# Altium PCB Hall Effect Sensor Panel PCB.PcbDoc
Units mm, origin at the board's own origin, x right, y up, seen from the top; angles counter-clockwise.
Board outline 358 x 45 mm, 2 copper layers (Top Layer, Bottom Layer); 56 components, 26 nets, 169 pads, 11 vias.
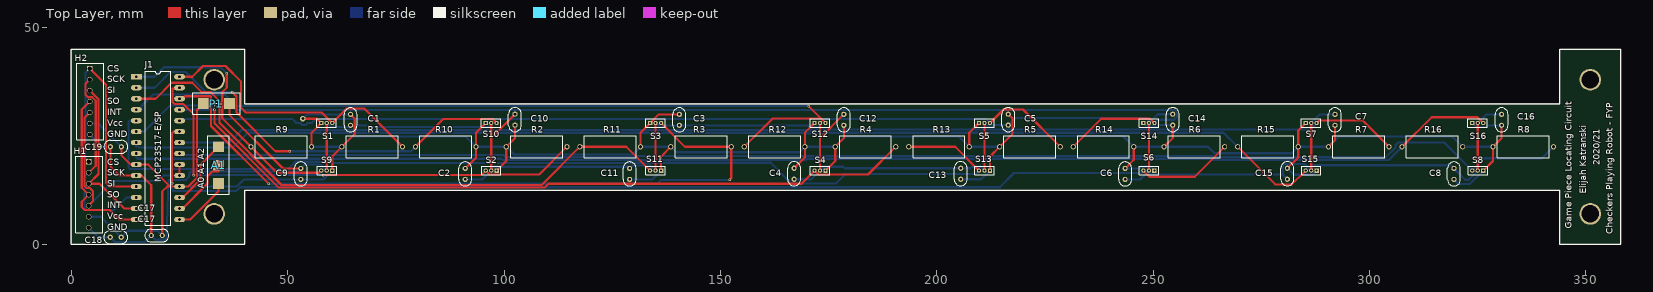
[diagram p0: Top Layer view]
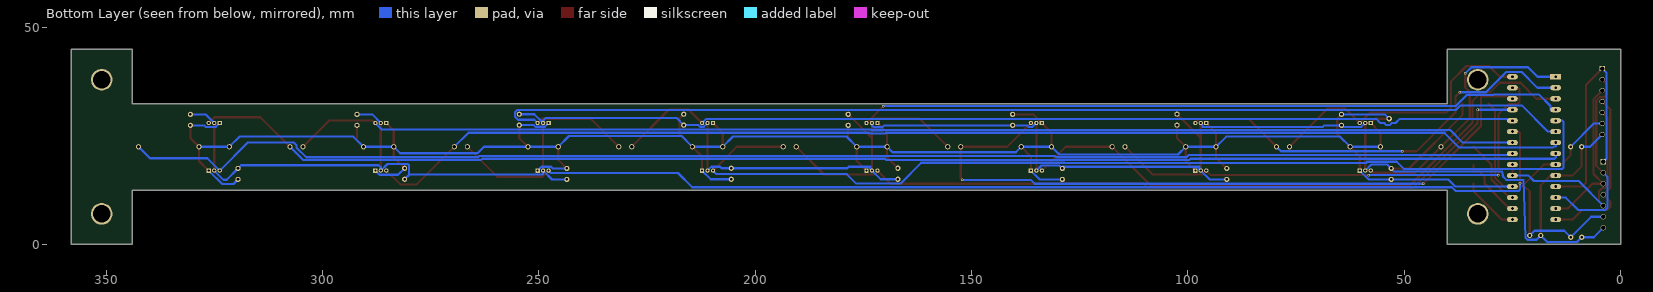
[diagram p1: Bottom Layer view, seen from below]

## Layer stack, top to bottom
Top Solder: solder mask 0.0102, Solder Resist, Dk 3.5
Top Layer: signal copper 0.0356
Dielectric 1: dielectric 0.32, FR-4, Dk 4.8
Bottom Layer: signal copper 0.0356
Bottom Solder: solder mask 0.0102, Solder Resist, Dk 3.5

## Board outline
344,32.5 344,45 358,45 358,0 344,0 344,12.5 40,12.5 40,0 0,0 0,45 40,45 40,32.5

## Design rules (kind name [scope] priority, off if disabled: settings)
Clearance [All] p1: gap=0.13 ignorepadtopadclearanceinfootprint=FALSE
PolygonConnect [All] p1: connectstyle=Relief reliefconductorwidth=0.254 reliefentries=4 polygonreliefangle="90 Angle" airgapwidth=0.254
RoutingVias [All] p1: holewidth=0.3 width=0.6 viastyle="Through Hole" minholewidth=0.3 minwidth=0.6 maxholewidth=0.3 maxwidth=0.6
SolderMaskExpansion [All] p1: expansion=0.102 istentingtop=FALSE
Width [All] p1: maxlimit=1 minlimit=0.3 preferedwidth=0.5
30 further rules are at their usual default settings.

## Components (designator, comment, footprint, x,y, rotation, side; value= is the part's Value field where it differs from the comment)
A1 "Address" ADDRESS 34,17 r90 top
C1 "0.1uF" C320C104K5R5TA 64.5,27.46 r90 top
C2 "0.1uF" C320C104K5R5TA 91,14.96 r90 top
C3 "0.1uF" C320C104K5R5TA 140.5,27.46 r90 top
C4 "0.1uF" C320C104K5R5TA 167,15 r90 top
C5 "0.1uF" C320C104K5R5TA 216.5,27.5 r90 top
C6 "0.1uF" C320C104K5R5TA 243.5,14.96 r90 top
C7 "0.1uF" C320C104K5R5TA 292,30 r270 top
C8 "0.1uF" C320C104K5R5TA 319.5,17.5 r270 top
C9 "0.1uF" C320C104K5R5TA 53,14.96 r90 top
C10 "0.1uF" C320C104K5R5TA 102.5,27.5 r90 top
C11 "0.1uF" C320C104K5R5TA 129,14.96 r90 top
C12 "0.1uF" C320C104K5R5TA 178.5,27.46 r90 top
C13 "0.1uF" C320C104K5R5TA 205.5,15 r90 top
C14 "0.1uF" C320C104K5R5TA 254.5,27.5 r90 top
C15 "0.1uF" C320C104K5R5TA 281,17.54 r270 top
C16 "0.1uF" C320C104K5R5TA 330.5,27.46 r90 top
C17 "0.1uF" C320C104K5R5TA 18.46,2 r0 top
C18 "0.1uF" C320C104K5R5TA 8.96,1.6 r0 top
C19 "0.1uF" C320C104K5R5TA 9,22.5 r0 top
H1 "1x7 Header" MOLEX 4,19.04 r0 top
H2 "1x7 Header" MOLEX 4.24,40.58 r0 top
J1 "16-Bit I/O Expander" MCP23S17-E/SP 15,38.7 r0 top
P1 "Power" POWER 33.5,32.5 r0 top
R1 "4k7R" CFR100J4K7 76.5,22.5 r180 top
R2 "4k7R" CFR100J4K7 114.5,22.5 r180 top
R3 "4k7R" CFR100J4K7 152.5,22.5 r180 top
R4 "4k7R" CFR100J4K7 190.5,22.5 r180 top
R5 "4k7R" CFR100J4K7 228.5,22.5 r180 top
R6 "4k7R" CFR100J4K7 266.5,22.5 r180 top
R7 "4k7R" CFR100J4K7 304.5,22.5 r180 top
R8 "4k7R" CFR100J4K7 342.5,22.5 r180 top
R9 "4k7R" CFR100J4K7 55.5,22.5 r180 top
R10 "4k7R" CFR100J4K7 93.5,22.5 r180 top
R11 "4k7R" CFR100J4K7 131.5,22.5 r180 top
R12 "4k7R" CFR100J4K7 169.5,22.5 r180 top
R13 "4k7R" CFR100J4K7 207.5,22.5 r180 top
R14 "4k7R" CFR100J4K7 245.5,22.5 r180 top
R15 "4k7R" CFR100J4K7 283.5,22.5 r180 top
R16 "4k7R" CFR100J4K7 321.5,22.5 r180 top
S1 "Hall Effect Sensor" A1104EUA-T 57.73,28 r90 top
S2 "Hall Effect Sensor" A1104EUA-T 98.27,17 r270 top
S3 "Hall Effect Sensor" A1104EUA-T 133.73,28 r90 top
S4 "Hall Effect Sensor" A1104EUA-T 174.27,17 r270 top
S5 "Hall Effect Sensor" A1104EUA-T 209.73,28 r90 top
S6 "Hall Effect Sensor" A1104EUA-T 250.27,17 r270 top
S7 "Hall Effect Sensor" A1104EUA-T 285.23,28 r90 top
S8 "Hall Effect Sensor" A1104EUA-T 326.27,17 r270 top
S9 "Hall Effect Sensor" A1104EUA-T 60.27,17 r270 top
S10 "Hall Effect Sensor" A1104EUA-T 95.73,28 r90 top
S11 "Hall Effect Sensor" A1104EUA-T 136.27,17 r270 top
S12 "Hall Effect Sensor" A1104EUA-T 171.73,28 r90 top
S13 "Hall Effect Sensor" A1104EUA-T 212.27,17 r270 top
S14 "Hall Effect Sensor" A1104EUA-T 247.73,28 r90 top
S15 "Hall Effect Sensor" A1104EUA-T 287.77,17 r270 top
S16 "Hall Effect Sensor" A1104EUA-T 323.73,28 r90 top

## Footprints (in the part's own frame and the unit in brackets; to place one, negate y for a bottom-side part, rotate by r counter-clockwise, add the part's x,y. Pads: shape width x height; smd on the part's side, far side on the other; paste and mask are expansions set on the pad)
A1104EUA-T [mm]
  rect 1x1 hole 0.5: 1(0,0)
  round 1 hole 0.5: 2(0,-1.27) 3(0,-2.54)
  silkscreen extent -1,-3.5 1,1
ADDRESS [mm]
  rect 2.5x2.5 smd: 1(-3,0) 2(1.25,0) 3(5.5,0)
  silkscreen extent -5.5,-2.5 8,2.5
C320C104K5R5TA [mm]
  round 1.2 hole 0.6: 1(0,0) 2(2.54,0)
  silkscreen extent -1.5,-1.5 4.04,1.5
CFR100J4K7 [mm]
  round 1.2 hole 0.76: 1(0,0) 2(14,0)
  silkscreen extent 1,-2.5 13,2.5
MCP23S17-E/SP [mm]
  rect 2.5x1.2 hole 0.65: 1(0,0)
  oval 2.5x1.2 hole 0.65: 2(0,-2.54) 3(0,-5.08) 4(0,-7.62) 5(0,-10.16) 6(0,-12.7) 7(0,-15.24) 8(0,-17.78) 9(0,-20.32) 10(0,-22.86) 11(0,-25.4) 12(0,-27.94) 13(0,-30.48) 14(0,-33.02) 15(10,-33.02) 16(10,-30.48) 17(10,-27.94) 18(10,-25.4) 19(10,-22.86) 20(10,-20.32) 21(10,-17.78) 22(10,-15.24) 23(10,-12.7) 24(10,-10.16) 25(10,-7.62) 26(10,-5.08) 27(10,-2.54) 28(10,0)
  silkscreen extent 2.09,-34.29 7.92,1.27
MOLEX [mm]
  rect 1.2x1.2 hole 1.02: 1(0,0)
  round 1.2 hole 1.02: 2(0,-2.54) 3(0,-5.08) 4(0,-7.62) 5(0,-10.16) 6(0,-12.7) 7(0,-15.24)
  silkscreen extent -3.02,-16.4 3.22,1.23
POWER [mm]
  rect 2.5x2.5 smd: 1(-3,0) 2(3,0)
  silkscreen extent -5.5,-2.5 5.5,2.5

## Part data
C1 C2 C3 C4 C5 C6 C7 C8 C9 C10 C11 C12 C13 C14 C15 C16 C17 C18 C19: library part C320C104K5R5TA, "KEMET - C320C104K5R5TA - Multilayer Ceramic Capacitor, Gold Max, 0.1 µF, 50 V, Goldmax, 300 Series, ± 10%, Radial Leaded", Capacitance=100nF, Case/Package=Radial, Dielectric=X7R, Dielectric Material=Ceramic, Manufacturer=KEMET, Max Operating Temperature=125°C, Min Operating Temperature=-55°C, Package Quantity=500, Supplier Part Number 1=1466304, Tolerance=10%, Voltage=50V, Category="Ceramic Capacitors", ComponentLink1Description=https://datasheet.ciiva.com/27052/1570161-27052544.pdf?src-supplier=Jameco, ComponentLink1URL=https://datasheet.ciiva.com/27052/1570161-27052544.pdf?src-supplier=Jameco, ComponentLink2Description=https://datasheet.ciiva.com/39122/f3101-goldmax-39122993.pdf?src-supplier=Onlinecomponents.com, ComponentLink2URL=https://datasheet.ciiva.com/39122/f3101-goldmax-39122993.pdf?src-supplier=Onlinecomponents.com, ComponentLink3Description=https://datasheet.ciiva.com/11786/0900766b80717e24-11786584.pdf?src-supplier=RSComponents, ComponentLink3URL=https://datasheet.ciiva.com/11786/0900766b80717e24-11786584.pdf?src-supplier=RSComponents, ComponentLink4Description=https://datasheet.ciiva.com/7817/1732702-7817354.pdf?src-supplier=Element14, ComponentLink4URL=https://datasheet.ciiva.com/7817/1732702-7817354.pdf?src-supplier=Element14, ComponentLink5Description=https://datasheet.ciiva.com/16624/datasheetpn-c320c104k5r5ca-16624750.pdf?src-supplier=Avnet+Europe, ComponentLink5URL=https://datasheet.ciiva.com/16624/datasheetpn-c320c104k5r5ca-16624750.pdf?src-supplier=Avnet+Europe, ComponentLink6Description=https://datasheet.ciiva.com/7817/f3101-goldmax-7817514.pdf?src-supplier=Element14, ComponentLink6URL=https://datasheet.ciiva.com/7817/f3101-goldmax-7817514.pdf?src-supplier=Element14, ComponentLink7Description=https://datasheet.ciiva.com/14585/70095037-14585005.pdf?src-supplier=Allied+Electronics, ComponentLink7URL=https://datasheet.ciiva.com/14585/70095037-14585005.pdf?src-supplier=Allied+Electronics, ComponentLink8Description=https://datasheet.ciiva.com/5389/f3101-goldmax-334604-5389886.pdf?src-supplier=Mouser, ComponentLink8URL=https://datasheet.ciiva.com/5389/f3101-goldmax-334604-5389886.pdf?src-supplier=Mouser, Depth=3.18mm, Dissipation Factor=2.5%, Height=3.18mm, Height - Seated (Max)=0.26inch, Lead Diameter=0.51mm, Lead Free="Lead Free", Lead Length=7mm, Lead Pitch=2.54mm, Lead/Base Style=Straight, Length=5.08mm, Manufacturer Part Number=C320C104K5R5TA, Mount="Through Hole,PCB", Number of Pins=2, Packaging=Bulk, Radiation Hardening=No, REACH SVHC="No SVHC", Resistor Type=Ceramic, RoHS=Yes, RoHS Compliant=Yes, Supplier 1=RSComponents, Termination=Radial, Voltage Rating=50V, Voltage Rating (DC)=50V, Width=0.125inch
H1 H2: library part 22-23-2071, "CONN HEADER VERT 7POS 2.54MM", Color=White, Contact Resistance=10mR, Current Rating=4A, Flammability Rating="UL94 V-0", Insulation Resistance=500GR, Manufacturer=Molex, Max Current Rating=10A, Max Operating Temperature=75°C, Max Voltage Rating (AC)=250V, Min Operating Temperature=0°C, Package Quantity=4000, Supplier Part Number 1=6795603P, Approvals=UL,CSA, Category="Headers and Wire Housings", ComponentLink1Description=https://datasheet.ciiva.com/30052/39000022232071-pcb-headers-30052246.pdf?src-supplier=Onlinecomponents.com, ComponentLink1URL=https://datasheet.ciiva.com/30052/39000022232071-pcb-headers-30052246.pdf?src-supplier=Onlinecomponents.com, ComponentLink2Description=https://datasheet.ciiva.com/7839/1575011-7839927.pdf?src-supplier=Element14, ComponentLink2URL=https://datasheet.ciiva.com/7839/1575011-7839927.pdf?src-supplier=Element14, ComponentLink3Description=https://datasheet.ciiva.com/5154/0022232071-pcb-headers-227102-5154393.pdf?src-supplier=Mouser, ComponentLink3URL=https://datasheet.ciiva.com/5154/0022232071-pcb-headers-227102-5154393.pdf?src-supplier=Mouser, ComponentLink4Description=https://datasheet.ciiva.com/11749/0900766b80d8f4d1-11749289.pdf?src-supplier=RSComponents, ComponentLink4URL=https://datasheet.ciiva.com/11749/0900766b80d8f4d1-11749289.pdf?src-supplier=RSComponents, ComponentLink5Description=https://datasheet.ciiva.com/19462/1966270-19462253.pdf?src-supplier=Jameco, ComponentLink5URL=https://datasheet.ciiva.com/19462/1966270-19462253.pdf?src-supplier=Jameco, ComponentLink6Description=https://datasheet.ciiva.com/49273/232311-49273642.pdf?src-supplier=Jameco, ComponentLink6URL=https://datasheet.ciiva.com/49273/232311-49273642.pdf?src-supplier=Jameco, ComponentLink7Description=https://datasheet.ciiva.com/16725/0022232071-pcb-headers-16725645.pdf?src-supplier=Avnet+Europe, ComponentLink7URL=https://datasheet.ciiva.com/16725/0022232071-pcb-headers-16725645.pdf?src-supplier=Avnet+Europe, ComponentLink8Description=https://datasheet.ciiva.com/10087/0022232071-pcb-headers-10087214.pdf?src-supplier=Avnet, ComponentLink8URL=https://datasheet.ciiva.com/10087/0022232071-pcb-headers-10087214.pdf?src-supplier=Avnet, Contact Gender=Male, Contact Material=Brass, Contact Plating=Tin,Copper, Depth=3.56mm, Gender=Male, Glow Wire Compliant=Non-compliant, Halogen Free="Low Halogen", Height=4.5mm, Housing Color=White, Housing Material=Nylon, Lead Free="Lead Free", Manufacturer Part Number=22-23-2071, Mount="Through Hole,Cable", Number of Circuits=7, Number of Contacts=7, Number of Positions=7, Number of Rows=1, Orientation=Straight, Packaging=Bulk, Pitch=2.54mm, Pricing 1="10=0.34600 (USD)", Radiation Hardening=No, REACH SVHC=Unknown, RoHS=Yes, RoHS Compliant=Yes, Series=6373, Stock 1=4279, Supplier 1=RSComponents, Termination="Through Hole", Voltage Rating=250V, Voltage Rating (DC)=250V
J1: library part MCP23S17-E/SP, "TE CONNECTIVITY         CFR100J4K7             Through Hole Resistor, 4.7 kohm, 500 V, Axial Leaded, 1 W,  5%, CFR Series", Case/Package=PDIP, Frequency=10MHz, Manufacturer=Microchip, Max Operating Temperature=125°C, Max Supply Voltage=5.5V, Min Operating Temperature=-40°C, Min Supply Voltage=1.8V, Nominal Supply Current=1mA, Number of Resistors=1, Power Rating=1W, Resistance=4.7kR, Resistor Type="Thin Film", Supplier Part Number 1=9126833, Temperature Coefficient=0ppm/°C, Tolerance=5%, Voltage Rating=500V, Category="Interface ICs", ComponentLink1Description=https://datasheet.ciiva.com/12096/21952b-70868-12096976.pdf?src-supplier=Mouser, ComponentLink1URL=https://datasheet.ciiva.com/12096/21952b-70868-12096976.pdf?src-supplier=Mouser, ComponentLink2Description=https://datasheet.ciiva.com/1780/21952b-1780558.pdf?src-supplier=Digi-Key, ComponentLink2URL=https://datasheet.ciiva.com/1780/21952b-1780558.pdf?src-supplier=Digi-Key, ComponentLink3Description=https://datasheet.ciiva.com/1495/12179-1495925.pdf?src-supplier=Element14, ComponentLink3URL=https://datasheet.ciiva.com/1495/12179-1495925.pdf?src-supplier=Element14, ComponentLink4Description=https://datasheet.ciiva.com/1496/12179-1496067.pdf?src-supplier=Element14, ComponentLink4URL=https://datasheet.ciiva.com/1496/12179-1496067.pdf?src-supplier=Element14, ComponentLink5Description=https://datasheet.ciiva.com/16331/filehandler-aspxddocname-en023709-16331287.pdf?src-supplier=Future+Electronics, ComponentLink5URL=https://datasheet.ciiva.com/16331/filehandler-aspxddocname-en023709-16331287.pdf?src-supplier=Future+Electronics, ComponentLink6Description=https://datasheet.ciiva.com/16617/21952b-16617642.pdf?src-supplier=Avnet+Europe, ComponentLink6URL=https://datasheet.ciiva.com/16617/21952b-16617642.pdf?src-supplier=Avnet+Europe, ComponentLink7Description=https://datasheet.ciiva.com/18405/70046137-18405548.pdf?src-supplier=Allied+Electronics, ComponentLink7URL=https://datasheet.ciiva.com/18405/70046137-18405548.pdf?src-supplier=Allied+Electronics, ComponentLink8Description=https://datasheet.ciiva.com/29305/651444-da-01-en-ic-i-o-exp-mcp23s17-e-sp-spdip-28-mcp-29305148.pdf?src-supplier=Conrad, ComponentLink8URL=https://datasheet.ciiva.com/29305/651444-da-01-en-ic-i-o-exp-mcp23s17-e-sp-spdip-28-mcp-29305148.pdf?src-supplier=Conrad, ComponentLink9Description=https://datasheet.ciiva.com/11823/0900766b80098b49-11823401.pdf?src-supplier=RSComponents, ComponentLink9URL=https://datasheet.ciiva.com/11823/0900766b80098b49-11823401.pdf?src-supplier=RSComponents, ComponentLink10Description=https://datasheet.ciiva.com/22664/1723854-22664921.pdf?src-supplier=Element14, ComponentLink10URL=https://datasheet.ciiva.com/22664/1723854-22664921.pdf?src-supplier=Element14, ComponentLink11Description=https://datasheet.ciiva.com/16773/70063023-16773435.pdf?src-supplier=Allied+Electronics, ComponentLink11URL=https://datasheet.ciiva.com/16773/70063023-16773435.pdf?src-supplier=Allied+Electronics, Diameter=5mm, ELV=Compliant, Interface=SPI,Serial, Lead Free="Lead Free", Length=12mm, Manufacturer Part Number=MCP23S17-E/SP, Max Frequency=10MHz, Mount="Through Hole,Surface Mount", Number of Bits=16, Number of Channels=1, Number of I/Os=16, Number of Pins=28, Number of Terminations=2, Packaging=Rail/Tube, Pricing 1="15=1.29300, 30=1.22600, 105=1.10500 (USD)", Pricing 2="10=0.11800, 100=0.10100, 250=0.08900, 500=0.07500, 1000=0.06400 (USD)", REACH SVHC="No SVHC", RoHS=Yes, RoHS Compliant=Yes, Stock 1=210, Stock 2=2440, Supplier 1=RSComponents, Supply Current=1mA, Supply Voltage-Nom=5.5V, Termination=Axial, Voltage Rating (DC)=500V
R1 R2 R3 R4 R5 R6 R7 R8 R9 R10 R11 R12 R13 R14 R15 R16: library part CFR100J4K7, "TE CONNECTIVITY         CFR100J4K7             Through Hole Resistor, 4.7 kohm, 500 V, Axial Leaded, 1 W,  5%, CFR Series", Case/Package=Conformal, Manufacturer="TE Connectivity", Max Operating Temperature=155°C, Min Operating Temperature=-55°C, Number of Resistors=1, Power Rating=1W, Resistance=4.7kR, Resistor Type="Thin Film", Supplier Part Number 1=0131873, Temperature Coefficient=0ppm/°C, Tolerance=5%, Voltage Rating=500V, Category="Through-Hole Resistors", ComponentLink1Description=https://datasheet.ciiva.com/11823/0900766b80098b49-11823401.pdf?src-supplier=RSComponents, ComponentLink1URL=https://datasheet.ciiva.com/11823/0900766b80098b49-11823401.pdf?src-supplier=RSComponents, ComponentLink2Description=https://datasheet.ciiva.com/22664/1723854-22664921.pdf?src-supplier=Element14, ComponentLink2URL=https://datasheet.ciiva.com/22664/1723854-22664921.pdf?src-supplier=Element14, ComponentLink3Description=https://datasheet.ciiva.com/16773/70063023-16773435.pdf?src-supplier=Allied+Electronics, ComponentLink3URL=https://datasheet.ciiva.com/16773/70063023-16773435.pdf?src-supplier=Allied+Electronics, Diameter=5mm, ELV=Compliant, Length=12mm, Manufacturer Part Number=CFR100J4K7, Mount=Axial, Number of Terminations=2, Packaging="Ammo Pack", Pricing 1="10=0.11800, 100=0.10100, 250=0.08900, 500=0.07500, 1000=0.06400 (USD)", REACH SVHC="No SVHC", RoHS=Yes, Stock 1=2440, Supplier 1=RSComponents, Termination=Axial, Voltage Rating (DC)=500V
S1 S2 S3 S4 S5 S6 S7 S8 S9 S10 S11 S12 S13 S14 S15 S16: library part A1104EUA-T, "ALLEGRO MICROSYSTEMS - A1104EUA-T - IC, HALL-EFFECT SWITCH SIP-3", Case/Package=SIP, Manufacturer="Allegro MicroSystems", Max Operating Temperature=85°C, Max Output Current=25mA, Max Supply Current=7.5mA, Max Supply Voltage=24V, Min Operating Temperature=-40°C, Min Supply Voltage=3.8V, Package Quantity=4000, Supplier Part Number 1=6807488, Category="Magnetic Sensors", ComponentLink1Description=https://datasheet.ciiva.com/15099/getdatasheetpartid-305695-15099469.pdf?src-supplier=Verical, ComponentLink1URL=https://datasheet.ciiva.com/15099/getdatasheetpartid-305695-15099469.pdf?src-supplier=Verical, ComponentLink2Description=https://datasheet.ciiva.com/1173/1697218-1173986.pdf?src-supplier=Newark, ComponentLink2URL=https://datasheet.ciiva.com/1173/1697218-1173986.pdf?src-supplier=Newark, ComponentLink3Description=https://datasheet.ciiva.com/3272/a110x-datasheet-3272173.pdf?src-supplier=Avnet, ComponentLink3URL=https://datasheet.ciiva.com/3272/a110x-datasheet-3272173.pdf?src-supplier=Avnet, Height=3.02mm, Lead Free="Lead Free", Length=4.09mm, Manufacturer Part Number=A1104EUA-T, Mount="Through Hole", Number of Pins=3, Operating Supply Current=7.5mA, Output Current=25mA, Output Type=Digital, Packaging=Bulk, Pricing 1="5=1.09300, 25=0.90800, 100=0.76300, 250=0.71200, 500=0.67100 (USD)", Radiation Hardening=No, REACH SVHC="No SVHC", RoHS=Yes, RoHS Compliant=Yes, Stock 1=245, Supplier 1=RSComponents, Type="Unipolar Switch", Width=1.52mm

## Free pads (board coordinates)
  round 5 hole 4: 1(33,38) 2(33,7) 3(351,38) 4(351,7)

## Via types
v1: diameter 0.6, hole 0.3, Top Layer to Bottom Layer, 10 vias
v2: diameter 1.27, hole 0.711, Top Layer to Bottom Layer, 1 vias

## Nets (pads, with @x,y where several pads share a name; then routed paths per layer and width w, separated by ;. In a path a pad name is that pad's centre, name@x,y a point inside that pad or via, vN(x,y) a via of type N, cw(c..) or ccw(c..) an arc to the next point about the centre after c; other vN are vias at no path point)
GND: C1.1 C2.1 C3.1 C4.1 C5.1 C6.1 C7.1 C8.1 C9.2 C10.2 C11.2 C12.2 C13.2 C14.2 C15.2 C16.2 C17.1 C18.1 C19.1 H1.7 H2.7 J1.10 P1.2 S1.2 S2.2 S3.2 S4.2 S5.2 S6.2 S7.2 S8.2 S9.2 S10.2 S11.2 S12.2 S13.2 S14.2 S15.2 S16.2 | length 557.4
  Top Layer w0.5: C19.1 9,18 11.16,15.84 J1.10 16.256,15.84 18.46,13.636 C17.1 ; P1.2 36.5,29.896 48.896,17.5 C9.2 ; S9.2 S1.2 ; S2.2 97,22.479 97,24.54 ; S10.2 97,24.54 ; C10.2 97,24.54 ; S11.2 S3.2 ; S4.2 173,22.479 173,24.5 ; S12.2 173,24.5 ; C12.2 173,24.5 ; S13.2 S5.2 ; S6.2 S14.2 ; S15.2 S7.2 ; S8.2 S16.2
  Bottom Layer w0.5: H1.7 6.2,1.6 C18.1 10.052,0.508 16.968,0.508 C17.1 19.444,1.016 21.488,1.016 21.996,1.524 22.403,14.859 26.416,14.859 27.102,15.545 27.386,16.764 52.264,16.764 C9.2 53.915,18.415 57.585,18.415 S9.2 ; H2.7 7.08,22.5 C19.1 ; S1.2 59.898,27.102 64.5,27.102 C1.1 68.476,27.46 68.834,27.102 96.622,27.102 96.622,27.622 S10.2 ; C2.1 94.96,14.96 S2.2 97.384,17.384 97.384,17.882 129,17.882 C11.2 129.688,18.188 133.812,18.188 S11.2 ; S3.2 135.898,27.102 136.802,27.102 137.16,27.46 C3.1 170.177,27.46 170.622,27.016 172.584,27.016 173,27.432 S12.2 ; C4.1 171,15 S4.2 173.38,17.38 173.38,17.882 178.359,17.882 178.7,17.54 C13.2 207.772,17.54 208.114,17.882 210.118,17.882 S13.2 ; S5.2 211.88,27.12 212.777,27.12 213.157,27.5 C5.1 218.185,29.185 248.412,29.185 249,28.597 S14.2 251.04,30.04 C14.2 ; C6.1 246.96,14.96 S6.2 249,16.078 280.01,16.078 ; S7.2 288.5,30 C7.1 ; S8.2 322.884,14.884 322.116,14.884 C8.1 318.763,18.237 287.02,18.237 286.5,17.78 S15.2 284.958,18.542 280.264,18.542 280.01,18.288 280.01,16.078 ; S16.2 327,30 C16.2 ; 280.01,16.078 280.01,15.99 C15.2 280.01,16.078
NetA1_1: A1.1 J1.15 | length 13.5
  Top Layer w0.5: J1.15 27.488,5.68 34,12.192 A1.1
NetA1_2: A1.2 J1.16 | length 15
  Top Layer w0.5: J1.16 25.654,8.22 31.445,14.011 31.445,15.723 32.512,16.789 34,16.789 A1.2
NetA1_3: A1.3 J1.17 | length 15.9
  Top Layer w0.5: J1.17 25.654,10.76 29.845,14.951 29.845,18.345 A1.3
NetH1_1: H1.1 H2.1 J1.11 | length 57.6
  Top Layer w0.5: H2.1 8.001,36.819 8.001,14.164 8.865,13.3 J1.11
  Bottom Layer w0.5: H1.1 3.251,19.789 3.251,39.591 H2.1
NetH1_2: H1.2 H2.2 J1.12 | length 46.1
  Top Layer w0.5: H1.2 5.61,18.11 5.61,33.176 4.826,33.96 3.835,33.96 3.251,34.544 3.251,37.051 H2.2
  Bottom Layer w0.5: H1.2 2.997,15.497 2.997,8.458 3.556,7.899 9.814,7.899 12.675,10.76 J1.12
NetH1_3: H1.3 H2.3 J1.13 | length 36.7
  Top Layer w0.5: H2.3 6.24,33.5 6.24,16.2 H1.3 6.503,13.96 12.243,8.22 J1.13
NetH1_4: H1.4 H2.4 J1.14 | length 40.3
  Top Layer w0.5: H2.4 2.39,31.11 2.39,13.03 H1.4 2.388,9.808 2.388,8.56 3.048,7.899 8.83,7.899 11.049,5.68 J1.14
NetH1_5: H1.5 H2.5 J1.19 J1.20 | length 50.1
  Top Layer w0.5: H1.5 5.004,9.884 5.004,12.192 4.216,12.979 3.556,12.979 3.02,13.515 3.02,29.2 H2.5 ; J1.19 J1.20
  Bottom Layer w0.5: H1.5 9.7,14.58 19.99,14.58 21.25,15.84 J1.19
NetJ1_1: J1.1 R9.2 S9.3 | length 61.4
  Top Layer w0.5: v1(35.89,39.472) 35.89,36.174 34.87,35.154 34.87,29.13 R9.2 47.49,16.51 57.24,16.51 S9.3
  Bottom Layer w0.5: J1.1 19.193,38.7 21.387,40.894 34.468,40.894 v1(35.89,39.472)
NetJ1_2: J1.2 R10.2 S10.3 | length 97.9
  Top Layer w0.5: v1(37.14,35.12) 38.13,34.13 38.13,30.48 47.122,21.488 v1(50.444,21.488) ; R10.2 85.905,28.905 97.365,28.905 S10.3
  Bottom Layer w0.5: J1.2 19.218,36.16 22.86,39.802 26.416,39.802 31.098,35.12 v1(37.14,35.12) ; v1(50.444,21.488) 78.488,21.488 R10.2
NetJ1_3: J1.3 R11.2 S11.3 | length 138.9
  Top Layer w0.5: J1.3 19.456,33.62 23.124,37.287 27.94,37.287 30.124,35.103 32.182,35.103 34.239,33.045 34.239,28.016 48.565,13.691 108.691,13.691 R11.2 128.23,22.5 S11.3
NetJ1_4: J1.4 R12.2 S12.3 | length 184.4
  Top Layer w0.5: R12.2 162.007,29.007 173.263,29.007 ; v1(170.368,31.902) 173.263,29.007 ; S12.3 173.263,29.007
  Bottom Layer w0.5: J1.4 16.18,31.08 16.18,31.928 18.872,34.62 29.36,34.62 29.512,34.468 35.571,34.468 38.136,31.902 v1(170.368,31.902)
NetJ1_5: J1.5 R13.2 S13.3 | length 231.7
  Top Layer w0.5: R13.2 204.23,22.5 S13.3
  Bottom Layer w0.5: J1.5 13.462,28.54 13.183,28.261 13.183,17.678 13.462,17.399 50.089,17.399 51.74,19.05 58.547,19.05 58.826,18.771 128.499,18.771 128.546,18.818 161.599,18.818 166.421,13.995 176.632,13.995 178.816,16.18 208.91,16.18 S13.3
NetJ1_6: J1.6 R14.2 S14.3 | length 272.4
  Top Layer w0.5: R14.2 237.981,28.981 249.289,28.981 S14.3
  Bottom Layer w0.5: J1.6 16.78,26 22.86,32.08 37.008,32.08 38.049,31.039 254.94,31.039 255.499,30.48 255.499,29.464 254.787,28.753 251.023,28.753 S14.3
NetJ1_7: J1.7 R15.2 S15.3 | length 279.1
  Top Layer w0.5: R15.2 278.182,13.818 282.048,13.818 S15.3
  Bottom Layer w0.5: J1.7 14.986,23.46 14.986,22.606 15.342,22.606 15.646,22.301 37.287,22.301 40.742,25.756 169.772,25.756 169.991,25.537 173.406,25.537 173.625,25.756 266.244,25.756 R15.2
NetJ1_8: J1.8 R16.2 S16.3 | length 317.4
  Top Layer w0.5: R16.2 314.337,29.337 324.933,29.337 S16.3
  Bottom Layer w0.5: J1.8 14.986,20.92 14.986,19.99 15.24,19.736 99.376,19.736 99.664,19.448 169.659,19.448 169.947,19.736 263.092,19.736 263.392,19.436 304.436,19.436 R16.2
NetJ1_21: J1.21 R8.1 S8.3 | length 325
  Bottom Layer w0.5: J1.21 24.994,20.92 24.994,20.599 99.784,20.599 100.306,20.078 130.466,20.078 130.759,20.371 263.728,20.371 264.033,20.066 303.759,20.066 305.994,22.301 305.994,22.86 306.629,23.495 317.235,23.495 S8.3 326.593,19.863 339.863,19.863 R8.1
NetJ1_22: J1.22 R7.1 S7.3 | length 284.2
  Top Layer w0.5: S7.3 288.345,28.575 298.425,28.575 R7.1
  Bottom Layer w0.5: J1.22 36.465,23.46 39.421,26.416 170.231,26.416 170.332,26.314 173.101,26.314 173.253,26.467 179.426,26.467 179.449,26.49 286.26,26.49 S7.3
NetJ1_23: J1.23 R6.1 S6.3 | length 263.7
  Top Layer w0.5: v1(23.241,14.072) 23.241,25.654 23.587,26 J1.23 ; S6.3 249.134,15.596 259.596,15.596 R6.1
  Bottom Layer w0.5: v1(23.241,14.072) 23.241,12.624 23.546,12.319 38.151,12.319 38.989,13.157 214.528,13.157 217.83,16.459 247.189,16.459 S6.3
NetJ1_24: J1.24 R5.1 S5.3 | length 210.1
  Top Layer w0.5: S5.3 215.385,31.115 219.885,31.115 R5.1
  Bottom Layer w0.5: J1.24 25.924,28.54 26.34,28.956 51.044,28.956 52,28 52.875,28 53.375,27.5 54.125,27.5 54.625,28 55.5,28 56.456,28.956 211.314,28.956 S5.3
NetJ1_25: J1.25 R4.1 S4.3 | length 179.5
  Top Layer w0.5: v1(33.045,31.08) 33.045,27.94 47.93,13.056 109.322,13.056 110.236,13.97 168.7,13.97 S4.3 172.626,16.104 184.104,16.104 R4.1
  Bottom Layer w0.5: J1.25 v1(33.045,31.08)
NetJ1_26: J1.26 R3.1 S3.3 | length 166.3
  Top Layer w0.5: J1.26 25.654,33.62 26.209,34.175 32.119,34.175 32.258,34.036 32.258,27.305 v1(45.593,13.97) ; S3.3 141.77,22.5 R3.1 152.5,15.238 v1(152.121,14.859)
  Bottom Layer w0.5: v1(45.593,13.97) 135.382,13.97 136.271,14.859 v1(152.121,14.859)
NetJ1_27: J1.27 R2.1 S2.3 | length 114.5
  Top Layer w0.5: J1.27 23.368,35.906 23.368,32.868 23.876,32.36 25.908,32.36 28.245,30.023 v1(28.245,15.951) ; v1(58.217,15.951) 94.681,15.951 S2.3 96.626,16.104 108.104,16.104 R2.1
  Bottom Layer w0.5: v1(28.245,15.951) v1(58.217,15.951)
NetJ1_28: J1.28 R1.1 S1.3 | length 66.6
  Top Layer w0.5: J1.28 27.94,38.7 30.401,41.161 35.599,41.161 39.218,37.542 39.218,31.496 40.284,30.429 57.841,30.429 S1.3 63.614,31.344 67.656,31.344 R1.1
Vcc: C1.2 C2.2 C3.2 C4.2 C5.2 C6.2 C7.2 C8.2 C9.1 C10.1 C11.1 C12.1 C13.1 C14.1 C15.1 C16.1 C17.2 C18.2 C19.2 H1.6 H2.6 J1.9 J1.18 P1.1 R1.2 R2.2 R3.2 R4.2 R5.2 R6.2 R7.2 R8.2 R9.1 R10.1 R11.1 R12.1 R13.1 R14.1 R15.1 R16.1 S1.1 S2.1 S3.1 S4.1 S5.1 S6.1 S7.1 S8.1 S9.1 S10.1 S11.1 S12.1 S13.1 S14.1 S15.1 S16.1 | length 630
  Top Layer w0.5: C19.2 11.54,20.556 13.716,18.38 J1.9 17.754,18.38 22.834,13.3 ; C17.2 21,12.192 22.108,13.3 22.834,13.3 ; P1.1 29.007,31.007 29.007,15.349 26.958,13.3 J1.18 22.834,13.3 ; v2(53.5,29) 56.73,29 S1.1 55.5,25.77 R9.1 ; S9.1 60.27,20.27 R1.2 65.481,25.481 65.481,29.019 C1.2 ; C2.2 93.5,20 R10.1 93.5,25.77 S10.1 ; S2.1 100.5,19.23 R2.2 102.5,24.5 C10.1 ; R11.1 131.5,25.77 S3.1 135.73,30 C3.2 ; S11.1 136.27,20.27 R3.2 ; C4.2 169.5,20.04 R12.1 169.5,25.77 S12.1 ; S4.1 176.5,19.23 R4.2 178.5,24.5 C12.1 ; R13.1 207.5,25.77 S5.1 ; S13.1 212.27,20.27 R5.2 217.5,25.5 217.5,29.04 C5.2 ; C6.2 245.5,19.5 R14.1 ; R6.2 254.5,24.5 C14.1 ; C15.1 283.5,20.04 R15.1 283.5,26.27 S7.1 ; R7.2 292,24 C7.2 ; S8.1 328.5,19.23 R8.2 330.5,24.5 C16.1
  Bottom Layer w0.5: H1.6 6.76,6.34 C18.2 12.999,3.099 19.901,3.099 C17.2 ; H2.6 6.16,27.88 C19.2 ; J1.18 38.151,13.3 39.811,14.96 C9.1 58.23,14.96 S9.1 ; v2(53.5,29) 54.5,30 C1.2 ; R9.1 R1.2 64.841,24.841 91.159,24.841 R10.1 R2.2 102.292,20.708 129.708,20.708 R11.1 R3.2 139.76,21.24 168.24,21.24 R12.1 R4.2 178.867,24.867 205.133,24.867 R13.1 R5.2 216.994,24.994 243.006,24.994 R14.1 R6.2 262.661,22.5 264.166,20.996 281.996,20.996 R15.1 R7.2 292.841,24.841 319.159,24.841 R16.1 R8.2 ; C11.1 134.23,14.96 S11.1 ; C13.1 210.27,15 S13.1 ; C6.2 246.786,17.5 247.168,17.882 249.388,17.882 S6.1 ; S14.1 248.61,27.12 250.775,27.12 251.155,27.5 C14.1 ; C15.1 282.513,16.027 286.797,16.027 S15.1 ; C8.2 320.566,13.894 323.164,13.894 S8.1 ; S16.1 324.628,27.102 326.997,27.102 327.355,27.46 C16.1

## Silkscreen, mask and mechanical layers (free items; w line width, h text height)
Top Overlay:
  the board outline again, w0.254
  text "2020/21" at 353.246,18.254 h1.52 r90
  text "Elijah Katranski" at 350.074,11.649 h1.52 r90
  text "Game Piece Locating Circuit" at 346.738,3.524 h1.52 r90
  text "Checkers Playing Robot - FYP" at 356.238,2.254 h1.52 r90

## Text inside footprints (layer, text, board x,y; h text height)
A1: Top Overlay "A0 A1 A2" at 30.746,12.754 h1.52 r90
H1: Top Overlay "GND" at 8.254,3.254 h1.52; Top Overlay "Vcc" at 8.254,5.754 h1.52; Top Overlay "INT" at 8.254,8.254 h1.52; Top Overlay "SO" at 8.254,10.754 h1.52; Top Overlay "SI" at 8.254,13.254 h1.52; Top Overlay "SCK" at 8.254,15.754 h1.52; Top Overlay "CS" at 8.254,18.254 h1.52
H2: Top Overlay "GND" at 8.254,24.754 h1.52; Top Overlay "Vcc" at 8.254,27.275 h1.52; Top Overlay "INT" at 8.254,29.796 h1.52; Top Overlay "SI" at 8.254,34.838 h1.52; Top Overlay "SCK" at 8.254,37.359 h1.52; Top Overlay "CS" at 8.254,39.88 h1.52; Top Overlay "SO" at 8.254,32.317 h1.52
J1: Top Overlay "MCP23S17-E/SP" at 20.746,14.254 h1.52 r90
P1: Top Overlay "+-" at 32.254,31.75 h1.52